# Altium PCB SHAJUN_MAIN_PCB.PcbDoc
Units mil, origin at the board's own origin, x right, y up, seen from the top; angles counter-clockwise.
Board outline 2074.72 x 1982.28 mil, 2 copper layers (Top Layer, Bottom Layer); 77 components, 66 nets, 204 pads, 301 vias.
Unrouted connection lines stored in the file: 256.
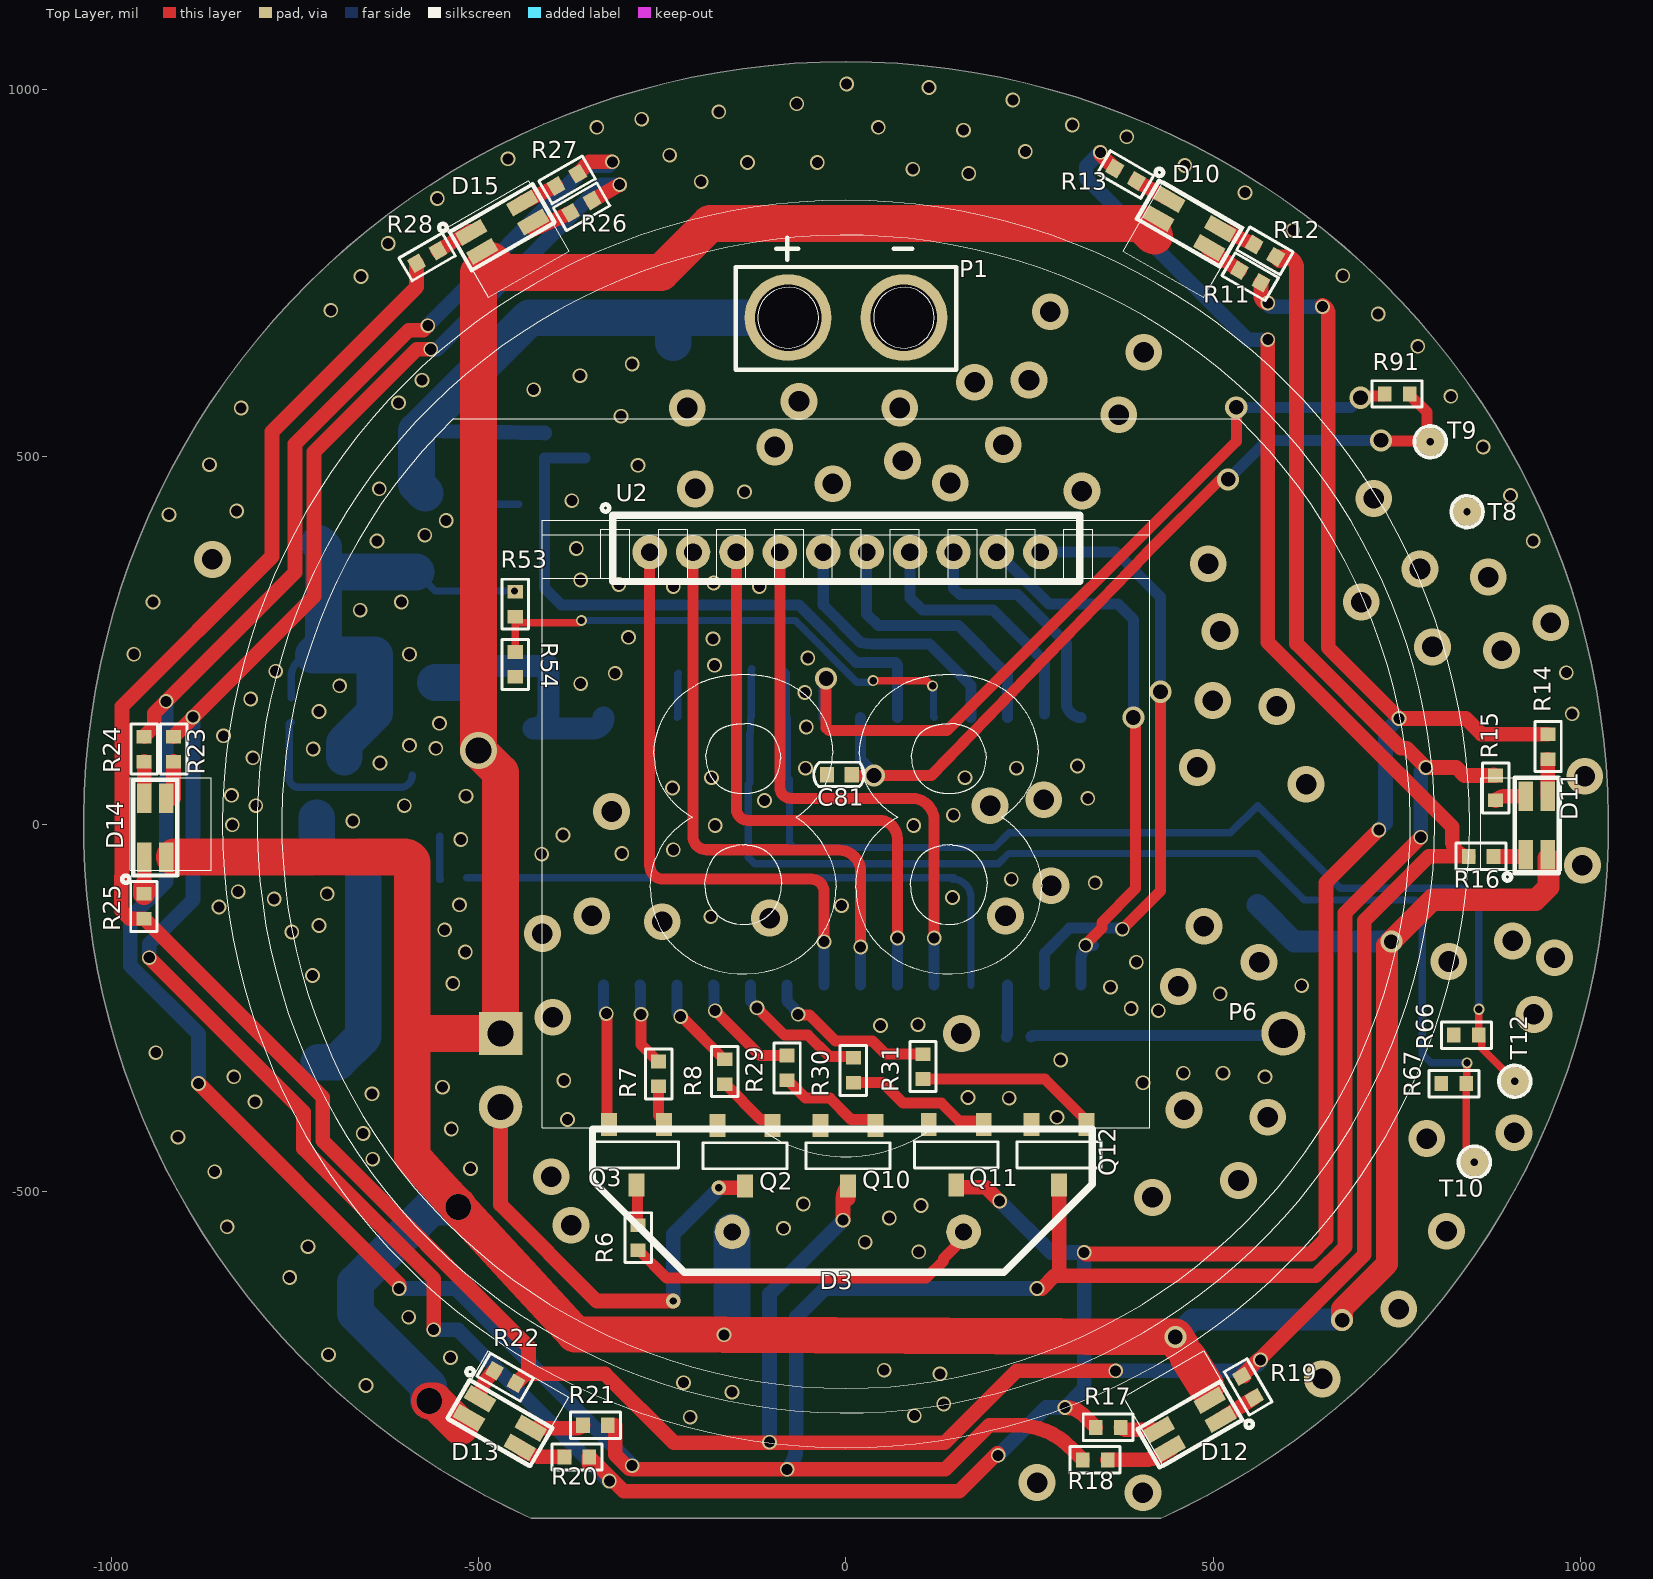
[diagram p0: Top Layer view]
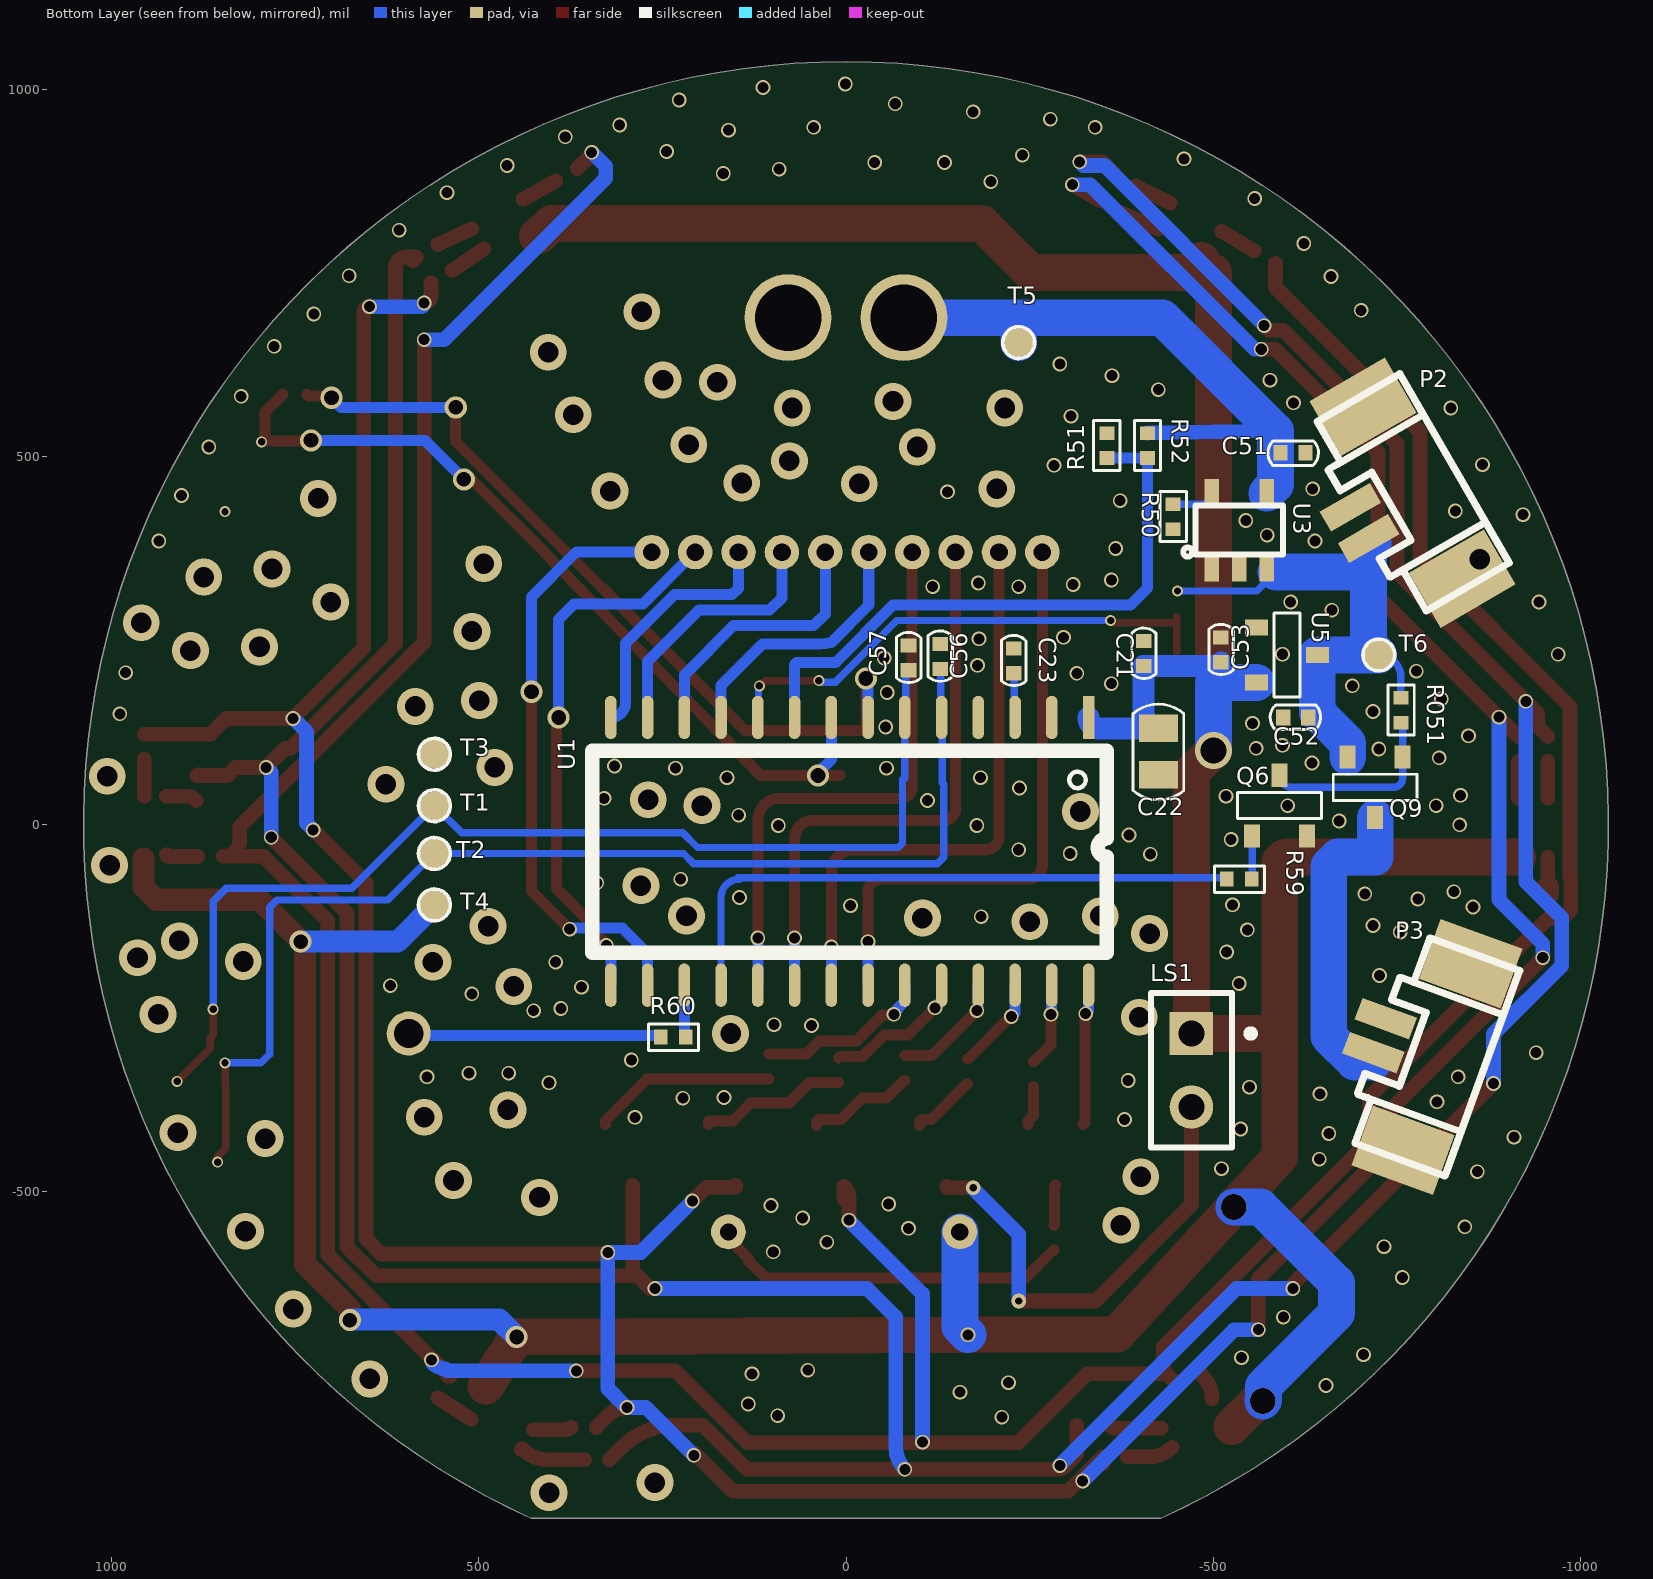
[diagram p1: Bottom Layer view, seen from below]

## Layer stack, top to bottom
Top Solder: solder mask 0.4, Solder Resist, Dk 3.5
Top Layer: signal copper 1.4
Dielectric 1: dielectric 12.6, FR-4, Dk 4.8
Bottom Layer: signal copper 1.4
Bottom Solder: solder mask 0.4, Solder Resist, Dk 3.5

## Board outline
-428.25,-944.88 cw(c0,0) 428.25,-944.88

## Design rules (kind name [scope] priority, off if disabled: settings)
Clearance [All] p1: gap=6 ignorepadtopadclearanceinfootprint=FALSE
ComponentClearance [All] p1: gap=0 collisioncheckmode=3 verticalgap=0 showdistances=FALSE
HoleSize [All] p1: absolutevalues=TRUE maxlimit=100 minlimit=6 maxpercent=80.000 minpercent=20.000
PolygonConnect [All] p1: connectstyle=Relief reliefconductorwidth=10 reliefentries=4 polygonreliefangle="90 Angle" airgapwidth=10
RoutingLayers RoutingLayers_1 [All] p1: top layer_v5=TRUE bottom layer_v5=TRUE
RoutingVias [All] p1: holewidth=15 width=20 viastyle="Through Hole" minholewidth=10 minwidth=15 maxholewidth=50 maxwidth=80
SolderMaskExpansion [All] p1: expansion=4
Width [All] p1: maxlimit=50 minlimit=6 preferedwidth=15
27 further rules are at their usual default settings.

## Classes and differential pairs
component class power_board: C51 C52 C53 D10 D11 D12 D14 D15 P1 P2 P3 Q6 Q9 Q10 Q11 Q12 R11 R12 R13 R14 R15 R16 R17 R18 R19 R20 R21 R22 R23 R24 R25 R26 R27 R28 R29 R30 R31 R50 R051 R51 R52 R53 R54 R59 T5 T6 U3 U5
component class main_board: C21 C22 C23 C56 C57 D3 LS1 P6 Q2 Q3 R6 R7 R8 R60 R66 R67 R91 T1 T2 T3 T4 T8 T9 T10 T12 U1 U2

## Components (designator, comment, footprint, x,y, rotation, side; value= is the part's Value field where it differs from the comment)
C21 "Cap" C0402 -405,231.93 r270 bottom value=104
C22 "Cap" C0805 -425,98.5 r90 bottom value=10uF
C23 "Cap" C0402 -228,222 r270 bottom value=223±5%
C51 "Cap" C0402 -608.07,505 r0 bottom value=1uF
C52 "Cap" C0402 -611.93,145 r180 bottom value=1uF
C53 "Cap" C0402 -510,236.93 r270 bottom value=1uF
C56 "Cap" C0402 -128,228 r270 bottom value=10nF
C57 "Cap" C0402 -85,226.07 r270 bottom value=10nF
C81 "Cap" C0402 -9.07,67 r0 top value=10nF
D3 "BACK_LIGHT" BACK_LIGHT -155,-555 r0 top
D10 "KO-2012RGB" KO-2012RGB 402.68,825.36 r330 top
D11 "KO-2012RGB" KO-2012RGB 965,-62 r90 top
D12 "KO-2012RGB" KO-2012RGB 507.32,-765.36 r210 top
D13 "KO-2012RGB" KO-2012RGB -535.32,-806.64 r330 top
D14 "KO-2012RGB" KO-2012RGB -915,-65 r90 top
D15 "KO-2012RGB" KO-2012RGB -507.32,760.36 r30 top
LS1 "Speaker" PIN2 -470,-285 r270 bottom
P1 "USB/5V" USB5.0V -125,647.95 r0 top
P2 "BAT/4.2" CON_1.25MM_2P -735,430 r60 bottom
P3 "UV/4.2V" CON_1.25MM_2P -764.75,-302.63 r110 bottom
P6 "TOUCHPAD" TP2MMAAA 595,-285 r0 top
Q2 "S8050" SOT23 -137.4,-451.34 r270 top
Q3 "S8050" SOT23 -285,-450 r270 top
Q6 "S8050" SOT23 -590,25 r90 bottom
Q9 "A03415" SOT23 -720,50 r270 bottom
Q10 "S8050" SOT23 2.6,-451.34 r270 top
Q11 "S8050" SOT23 150,-450 r270 top
Q12 "S8050" SOT23 290,-450 r270 top
R6 "1.2k" R0402 -283,-563 r90 top value=10R
R7 "1.2k" R0402 -255,-340 r90 top value=1k
R8 "1.2k" R0402 -165,-336.93 r90 top value=1k
R11 "1.2k" R0402 550,745 r330 top value=12R
R12 "1.2k" R0402 570,780 r330 top value=12R
R13 "1.2k" R0402 380.34,883.46 r150 top value=80R
R14 "1.2k" R0402 955,105.07 r90 top value=12R
R15 "1.2k" R0402 884,49.07 r90 top value=12R
R16 "1.2k" R0402 864,-44 r180 top value=80R
R17 "1.2k" R0402 356.93,-821 r180 top value=12R
R18 "1.2k" R0402 339,-865 r180 top value=12R
R19 "1.2k" R0402 547,-766 r120 top value=80R
R20 "1.2k" R0402 -366.07,-861 r0 top value=12R
R21 "1.2k" R0402 -340.93,-818 r0 top value=12R
R22 "1.2k" R0402 -463.66,-752.54 r330 top value=80R
R23 "1.2k" R0402 -915,101.93 r90 top value=12R
R24 "1.2k" R0402 -955,101.93 r90 top value=12R
R25 "1.2k" R0402 -955,-111.93 r270 top value=80R
R26 "1.2k" R0402 -360,840 r30 top value=12R
R27 "1.2k" R0402 -379.66,876.54 r30 top value=12R
R28 "1.2k" R0402 -569.66,771.54 r210 top value=80R
R29 "1.2k" R0402 -80,-331.93 r270 top value=1k
R30 "1.2k" R0402 10,-335 r270 top value=1k
R31 "1.2k" R0402 105,-330 r270 top value=1k
R50 "Res2" R0402 -445,418.07 r90 bottom value=1.65K
R51 "Res1" R0402 -355,515 r270 bottom value=5.1K
R051 "Res1" R0402 -755,155 r90 bottom value=100K
R52 "Res1" R0402 -410,515 r90 bottom value=5.1K
R53 "Res1" R0402 -450,298.93 r90 top value=1M
R54 "Res1" R0402 -450,217.07 r90 top value=1M
R59 "1.2k" R0402 -535,-75 r180 bottom value=1k
R60 "Res1" R0402 235,-290 r180 bottom value=3.3K
R66 "1.2k" R0402 843.93,-287 r0 top value=1.2K
R67 "1.2k" R0402 827,-353 r0 top value=1.2K
R91 "Res1" R0402 750,585 r180 top value="5.1k 1%"
T1 "R" TP1_3MMD 560,25 r90 bottom
T2 "T" TP1_3MMD 560,-40 r90 bottom
T3 "G" TP1_3MMD 560,95 r90 bottom
T4 "V" TP1_3MMD 560,-110 r90 bottom
T5 "USB/5V" TP1_3MMD -235,655 r180 bottom
T6 "BAT/4.2V" TP1_3MMD -725,230 r180 bottom
T8 "NTC" TP1_3MMD 845,425 r0 top
T9 "NTC" TP1_3MMD 795,520 r0 top
T10 "TDS+" TP1_3MMD 855,-460 r90 top
T12 "TDS-" TP1_3MMD 910,-350 r90 top
U1 "CA51F353S6" CA51F35S6-SOP28 -330,145 r270 bottom locked
U2 "LCD" LCD_DISPLAY -267.17,370 r0 top
U3 "PL4054" SOT23-5 -535,400 r180 bottom
U5 "XC6206P302MR" SOT23 -600,230 r180 bottom

## Footprints (in the part's own frame and the unit in brackets; to place one, negate y for a bottom-side part, rotate by r counter-clockwise, add the part's x,y. Pads: shape width x height; smd on the part's side, far side on the other; paste and mask are expansions set on the pad)
BACK_LIGHT [mm]
  round 1.2 hole 0.6: 1(0,0) 2(8,0)
  silkscreen extent -4.83,-1.4 12.45,3.56
C0402 [mm]
  rect 0.49x0.54 smd: 1(-0.43,0) 2(0.43,0)
  Top Layer pour cut-out: -0.071,-0.244 -0.071,0.244 0.071,0.244 0.071,-0.244 -0.071,-0.244
  silkscreen extent -0.88,-0.41 0.86,0.43
C0805 [mm]
  rect 0.95x1.35 smd: 1(-0.8,0) 2(0.8,0)
  silkscreen extent -1.67,-0.88 1.64,0.88
CA51F35S6-SOP28 [mm]
  rect 1.5x0.4 smd: 1(0,0)
  oval 1.5x0.4 smd: 2(0,-1.27) 3(0,-2.54) 4(0,-3.81) 5(0,-5.08) 6(0,-6.35) 7(0,-7.62) 8(0,-8.89) 9(0,-10.16) 10(0,-11.43) 11(0,-12.7) 12(0,-13.97) 13(0,-15.24) 14(0,-16.51) 15(9.254,-16.51) 16(9.254,-15.24) 17(9.254,-13.97) 18(9.254,-12.7) 19(9.254,-11.43) 20(9.254,-10.16) 21(9.254,-8.89) 22(9.254,-7.62) 23(9.254,-6.35) 24(9.254,-5.08) 25(9.254,-3.81) 26(9.254,-2.54) 27(9.254,-1.27) 28(9.254,0)
  silkscreen extent 1.14,-17.15 8.13,0.63
CON_1.25MM_2P [mm]
  rect 0.8x2 smd: 1(-0.609,1.056) 2(0.641,1.056)
  rect 2.2x3 smd: 3(3.429,-1.056) 4(-3.429,-1.056)
  silkscreen extent -3.77,-2.73 3.78,1.08
KO-2012RGB [mil]
  rect 40x20 smd: 1(20,40) 2(100,40) 3(20,10) 4(100,10)
  silkscreen extent -15,-5 125,70
LCD_DISPLAY [mil]
  round 47 hole 24: 1(0,0) 2(59.06,0) 3(118.11,0) 4(177.17,0) 5(236.22,0) 6(295.28,0) 7(354.33,0) 8(413.39,0) 9(472.44,0) 10(531.5,0)
  silkscreen extent -65,-40 585,65
PIN2 [mm] "Photosensitive Diode; 2 Leads"
  rect 1.5x1.5 hole 0.9: 1(0,0)
  round 1.5 hole 0.9: 2(2.54,0)
  silkscreen extent -1.4,-1.4 3.94,2.17
R0402 [mm]
  rect 0.47x0.52 smd: 1(-0.43,0) 2(0.43,0)
  silkscreen extent -0.86,-0.46 0.87,0.45
SOT23 [mm]
  rect 0.8x0.55 smd: 1(-1.05,0.95) 2(-1.05,-0.95) 3(1.05,0)
  silkscreen extent -0.45,-1.45 0.45,1.45
SOT23-5 [mm]
  rect 0.5x1 smd: 1(-0.952,-1.27) 2(0,-1.27) 3(0.953,-1.27) 4(0.953,1.27) 5(-0.952,1.27)
  silkscreen extent -1.94,-0.92 1.51,0.85
TP1_3MMD [mm]
  round 1 smd: 1(0,0)
  silkscreen extent -0.55,-0.55 0.55,0.55
TP2MMAAA [mil]
  round 60 hole 40 mask+5: 1(0,0)
USB5.0V [mm]
  round 3 hole 2.3: 1(1.175,1.042) 2(5.175,1.042)
  silkscreen extent -0.64,-0.76 6.98,3.81

## Part data
C21 C22 C23 C51 C52 C53 C56 C57 C81: "电容", LatestRevisionDate=17-Jul-2002, LatestRevisionNote="Re-released for DXP Platform.", PackageDescription="Radial Cap, Thru-Hole; 2 Leads; 0.3 in Pin Spacing", PackageReference=RAD-0.3, Published=8-Jun-2000, Publisher="Altium Limited"
D3: "LCD背光"
D10 D11 D12 D13 D14 D15: "三色LED"
LS1: "蜂鸣器", LatestRevisionDate=17-Jul-2002, LatestRevisionNote="Re-released for DXP Platform.", PackageReference=PIN2, Published=24-Mar-1999, Publisher="Altium Limited"
P1: library part "Header 2", "充电焊接口", LatestRevisionDate=17-Jul-2002, LatestRevisionNote="Re-released for DXP Platform.", Publisher="Altium Limited"
P2: library part "Header 2", "电池连接母座", LatestRevisionDate=17-Jul-2002, LatestRevisionNote="Re-released for DXP Platform.", Publisher="Altium Limited"
P3: library part "Header 2", "UV灯接口", LatestRevisionDate=17-Jul-2002, LatestRevisionNote="Re-released for DXP Platform.", Publisher="Altium Limited"
P6: "触摸弹簧"
Q2 Q3 Q6 Q10 Q11 Q12: "三极管"
Q9: "PMOS管"
R6 R7 R8 R11 R12 R13 R14 R15 R16 R17 R18 R19 R20 R21 R22 R23 R24 R25 R26 R27 R28 R29 R30 R31 R59 R66 R67: library part Res3, "电阻", LatestRevisionDate=29-May-2009, LatestRevisionNote="IPC-7351 Footprint Added.", PackageDescription="Chip Resistor", PackageReference=J1-0603, Published=8-Jun-2000, Publisher="Altium Limited"
R50 R51 R051 R52 R53 R54 R60 R91: "电阻", LatestRevisionDate=17-Jul-2002, LatestRevisionNote="Re-released for DXP Platform.", Published=8-Jun-2000, Publisher="Altium Limited"
  R50: PackageDescription="Axial Device, Thru-Hole; 2 Leads; 0.4 in Pin Spacing", PackageReference=AXIAL-0.4
  R51 R051 R52 R53 R54 R60 R91: PackageDescription="Axial Device, Thru-Hole; 2 Leads; 0.3 in Pin Spacing", PackageReference=AXIAL-0.3
T1: library part TEST, "烧录点Rx"
T2: library part TEST, "烧录点Tx"
T3: library part TEST, "烧录点GND"
T4: library part TEST, "烧录点VCC"
T5: library part TEST, "USB充电检测点"
T6: library part TEST, "电池检测点"
T8 T9: library part TEST, "NTC焊点"
T10 T12: library part TEST, "TDS焊点"
U1: "主控IC"
U2: "LCD显示屏"
U3: "充电IC"
U5: "稳压IC"

## Via types
v1: diameter 20, hole 15, Top Layer to Bottom Layer, 213 vias
v2: diameter 50, hole 28, Top Layer to Bottom Layer, 62 vias
v3: diameter 30, hole 20, Top Layer to Bottom Layer, 11 vias
v4: diameter 15, hole 10, Top Layer to Bottom Layer, 10 vias
v5: diameter 20, hole 10, Top Layer to Bottom Layer, 2 vias
v6: diameter 35, hole 35, Top Layer to Bottom Layer, 2 vias
v7: diameter 50, hole 35, Top Layer to Bottom Layer, 1 vias

## Nets (pads, with @x,y where several pads share a name; then routed paths per layer and width w, separated by ;. In a path a pad name is that pad's centre, name@x,y a point inside that pad or via, vN(x,y) a via of type N, cw(c..) or ccw(c..) an arc to the next point about the centre after c; other vN are vias at no path point)
BACK_LIGHT: R7.2 U1.27 | length 114.7
  Top Layer w15: v1(-279,-259) -279,-300.06 -255.98,-323.07 R7.2
  Bottom Layer w15: U1.27 -279.86,-219.47 -279.86,-258.14 v1(-279,-259)
BAT/4.2V: C52.2 P2.1 Q9.2 R051.2 R53.2 T6.1 U3.3 U5.3 | length 747.5
  Top Layer w10: v4(-451,317) -451,316.86 R53.2
  Bottom Layer w10: R051.2 -755,200 cw(c-725,200) T6.1 ; -585,343 -559,317 v4(-451,317)
  Bottom Layer w50: P2.1@-717.24,382.17 -710.97,375.9 -710.97,343 ; Q9.2 -682.6,110.08 -641.34,151.34 U5.3 T6.1 -710.97,244.03 -710.97,343 ; -585,343 -710.97,343
BAT_ADC: R53.1 R54.2 U1.10 | length 699.6
  Top Layer w10: R54.2 R53.1@-450,274 ; R53.1 R53.1@-450,274 ; v4(-360,277) -363,274 R53.1@-450,274 ; v4(37,195) 110,195 117,188 v4(118,188)
  Bottom Layer w10: v4(-360,277) -69.23,277 14.77,193 35,193 v4(37,195) ; v4(118,188) 118.96,187.04 118.96,146.04 U1.10
BLUE: Q11.3 R11.2 R14.2 R17.2 R20.2 R23.2 R26.2 | length 5648.5
  Top Layer w20: v1(-948,-181.88) -738,-391.88 -738,-441.77 -561,-618.77 v1(-561,-688) ; R23.2 v1(-888.43,145.43) -723.76,310.1 -723.76,506.24 -584,646 v1(-565,646) ; R20.2@-349.89,-870.01 -349.89,-861.24 -349.65,-861 R20.2 -302.14,-908 154,-908 206,-856 cw(c203.59,-858.41) 207,-858.41 v1(207,-859) ; R26.2 v1(-308,870) ; Q11.3 150,-494 190,-494 v1(209,-513) ; v1(298,-794) cw(c298,-830.21) 323.61,-804.61 R17.2 ; v1(324,-583) 326,-585 632.23,-585 653,-564.23 653,-80 v1(725,-8) ; R11.2 564.66,718.34 ccw(c574,718.34) v1(574,709) ; v1(648.35,704) 648.35,705.48 cw(c645,695) 656,695 656,240.02 v1(752.36,143.66) 843.1,143.66 864.77,122 R14.2
  Bottom Layer w20: v1(-948,-181.88) -948,-162.77 -888.43,-103.19 v1(-888.43,145.43) ; v1(-565,646) -556,646 -332,870 v1(-308,870) ; v1(-561,-688) -528,-688 v1(-322,-894) ; v1(207,-859) 272,-794 v1(298,-794) 324,-768 v1(324,-583) 279,-583 v1(209,-513) ; v1(574,709) ccw(c579,709) 579,704 v1(648.35,704) ; v1(725,-8) 734,1 734,125.31 v1(752.36,143.66)
CHARG_CHECK: R51.2 R52.1 U1.9 | length 826.8
  Bottom Layer w15: R51.2 R52.1 -410,321 -387,298 -64.07,298 13.93,220 65,220 cw(c65,215) 70,215 U1.9
COM1: U1.22 U2.1 | length 811.1
  Top Layer w15: U2.1 -267.17,-56.25 ccw(c-248.42,-56.25) -248.42,-75 -47.07,-75 cw(c-47.07,-92.07) -30,-92.07 v1(-30,-160)
  Bottom Layer w15: U1.22 v1(-30,-160)
COM2: U1.21 U2.2 | length 800.2
  Top Layer w15: U2.2@-205.87,367.76 U2.2 -208.11,-16.89 ccw(c-190,-16.89) -190,-35 -80,-35 cw(c-80,-135) -69.44,-35.56 -9.44,-35.56 cw(c-9.44,-65) 20,-65 20,-124.44 19.44,-124.44 cw(c-80,-135) 20,-135 v1(20,-167.3)
  Bottom Layer w15: U1.21 v1(20,-167.3)
COM3: U1.20 U2.3 | length 791
  Top Layer w15: U2.3 -149.06,20.42 ccw(c-133.63,20.42) -133.63,5 45,5 cw(c45,-20) 70,-20 v1(70,-155)
  Bottom Layer w15: U1.20 v1(70,-155)
COM4: U1.19 U2.4 | length 780
  Top Layer w15: U2.4 -90,50 ccw(c-75,50) -75,35 90,35 cw(c90,5) 120,5 v1(120,-155)
  Bottom Layer w15: U1.19 v1(120,-155)
GND: C21.1 C22.1 C23.1 C51.1 C52.1 C53.1 C56.1 C57.1 C81.1 P1.2 P2.2 P3.2 Q2.2 Q3.2 Q6.2 Q10.2 Q11.2 Q12.2 R50.1 R51.1 R54.1 R66.1 R67.1 T3.1 T8.1 U1.28 U3.2 U5.1 | length 192.5
  Top Layer w15: v1(-326,-258) -325.04,-258.96 -325.04,-406.02 Q3.2
  Bottom Layer w15: U1.28 -329.86,-219.47 -329.86,-254.14 v1(-326,-258)
  other v1: -212,-807 93,-805 133,-789 -155,-773 -653,-764 -221,-760 128,-748 52,-743 -538,-726 -704,-722 -595,-671 -757,-617 99,-582 -732,-575 26,-569 -85,-550 -842,-548 59,-536 102,-519 -58,-517 -859,-473 -511,-469 -644,-456 -909,-426 -657,-421 -537,-415 -379,-402 287,-399 -804,-378 222,-373 166,-372 -645,-367 -549,-358 404,-352 -384,-349 -833,-344 570,-344 459,-339 513,-339 292,-321 -939,-311 47,-274 98,-273 425,-254 388,-251 509,-231 360,-222 620,-220 -535,-217 -726,-206 395,-188 -518,-174 -754,-147 -546,-144 -717,-138 -184,-126 -853,-113 -6,-111 -526,-110 -778,-102 145,-100 -706,-95 -827,-92 339,-80 225,-75 -414,-41 -305,-40 -235,-35 -524,-21 -385,-15 -178,-2 92,-2 -835,-1 -671,4 146,12 -803,25 -601,25 -111,32 329,35 -517,38 -836,39 -236,49 -183,63 162,63 -55,76 232,76 315,79 -634,83 -807,90 -725,102 -558,103 -594,107 -847,120 -54,132 -553,137 988,150 -717,153 -810,170 -56,179 -689,188 -361,191 -314,205 980,206 -776,208 -179,216 -52,226 -969,231 -594,231 -181,252 -296,254 -661,291 -943,302 -605,302 -235,323 -118,323 -309,326 -180,328 -361,332 -367,375 -638,385 935,385 -573,393 -544,413 -921,421 -829,426 -373,440 904,447 -138,452 -635,456 -283,488 -866,489 867,513 -306,555 -823,566 -609,573 823,582 -425,591 -577,604 -362,610 -291,626 778,650 724,694 -701,699 -660,745 676,746 -623,790 608,808 -556,851 543,859 -197,874 167,885 91,891 461,896 -134,900 -39,900 -460,905 -240,910 244,915 382,935 160,944 -339,948 44,948 308,951 -278,959 -173,969 -67,980 227,985 113,1002 1,1007
  other v2: 404,-910 260,-896 648,-755 752,-660 817,-554 -374,-546 417,-508 534,-485 -401,-480 790,-428 909,-420 574,-399 460,-389 157,-285 -399,-263 936,-259 452,-221 562,-188 820,-187 964,-182 907,-159 -413,-149 487,-139 -250,-133 -104,-128 -346,-125 217,-125 279,-84 1002,-56 -319,17 196,25 269,33 626,54 1005,65 478,77 586,160 499,168 892,236 798,241 509,262 959,274 701,302 874,336 781,347 493,354 718,443 321,453 -205,456 -18,463 142,464 77,494 -97,513 214,516 371,557 -216,566 73,566 -64,575 175,601 249,604 405,642 278,697
  other v4: 845,425
GREEN: Q12.3 R12.2 R15.2 R18.2 R21.2 R24.2 R27.2 | length 5957.8
  Top Layer w20: R24.2 -955,119.37 -941.24,133.13 -941.24,150.7 v1(-924.97,166.97) -749.76,342.18 -749.76,517.01 -594.77,672 -575,672 v1(-569,678) ; v1(-881,-353) -608,-626 v1(-608,-632) ; R27.2 -349,901 v1(-318,901) ; -314,-818 -314,-858 v1@-295,-877 ; v1@-291,-878 v1(-80,-878) 135,-878 195,-818 233.65,-818 cw(c233.65,-918) 304.36,-847.29 R18.2 ; v1(260,-632) 266.29,-632 283.58,-614.71 287,-614.71 ; Q12.3 290,-611.71 287,-614.71 ; R12.2@589.44,766.76 R12.2 598.46,771.54 cw(c598.46,757) 613,757 613,245.23 755.12,103.12 762.88,103.12 v1(789,77) 830.49,77 841.49,66 883.41,66 cw(c883.41,69.41) R15.2@881,67 ; v1(782,-18) 679,-121 679,-575 639.29,-614.71 287,-614.71
  Bottom Layer w20: v1(-924.97,166.97) -924.97,-78.5 -974,-127.53 -974,-192.65 -881,-285.65 v1(-881,-353) ; v1(-608,-632) -531.23,-632 -291,-872.23 v1(-291,-873) ; v1(-569,678) -569,678.77 -351.77,896 -323,896 v1(-318,901) ; v1(-80,-878) ccw(c-109.54,-848.46) -67.77,-848.46 -67.77,-670.77 -29,-632 v1(260,-632) ; v1(782,-18) 782,70 v1(789,77)
LED_B: R30.1 U1.24 | length 193.6
  Top Layer w15: v1(-121,-250) -84,-287 -52.06,-287 -22.74,-316.32 8.25,-316.32 R30.1
  Bottom Layer w15: U1.24 -130,-240.99 v1(-121,-250)
LED_G: R31.1 U1.23 | length 238.3
  Top Layer w15: v1(-65,-259) -64.04,-259.96 -49.36,-259.96 -14,-295.32 36.13,-295.32 53.88,-313.07 R31.1
  Bottom Layer w15: U1.23 -80,-240.78 -69.78,-251 -69.78,-252.87 -65,-257.65 v1(-65,-259)
LED_R: R29.1 U1.25 | length 158.8
  Top Layer w15: v1(-178,-254) -117,-315 R29.1
  Bottom Layer w15: U1.25 -179.86,-219.47 -179.86,-250.79 -178,-252.65 v1(-178,-254)
NetC23_2: C23.2 U1.3 | length 60.9
  Bottom Layer w10: U1.3 -229,146 -229,204.07 C23.2
NetC82_1: 
NetD3_2: D3.2 R6.1 | length 491.8
  Top Layer w15: R6.1 -282.02,-579.93 -244,-617.94 109.06,-617.94 132.58,-594.42 132.58,-591.11 159.96,-563.73 D3.2
NetD10_1: D10.1 R13.1 | length 51.5
  Top Layer w20: R13.1 D10.1
NetD10_2: D10.2 R12.1 | length 50.8
  Top Layer w20: D10.2 R12.1
NetD10_4: D10.4 R11.1 | length 51.5
  Top Layer w20: D10.4@492.97,782.71 493.24,782.52 R11.1
NetD11_1: D11.1 R16.1 | length 43.6
  Top Layer w20: R16.1@882,-44.14 919.83,-44.14 ccw(c919.83,-36.83) D11.1
NetD11_2: D11.2 R15.1 | length 42.6
  Top Layer w20: R15.1 cw(c898.14,18) 898.14,38 D11.2
NetD11_4: D11.4 R14.1 | length 50.1
  Top Layer w20: D11.4 R14.1
NetD12_1: D12.1 R19.1 | length 54.1
  Top Layer w20: D12.1 R19.1
NetD12_2: D12.2 R18.1 | length 90.8
  Top Layer w20: R18.1 404.51,-865 ccw(c404.51,-813.79) D12.2 441.87,-851.44 D12.2@442.03,-851.31
NetD12_4: D12.4 R17.1 | length 52.7
  Top Layer w20: R17.1 ccw(c381.15,-813.71) 381.15,-824.02 D12.4
NetD13_1: D13.1 R22.1 | length 44.2
  Top Layer w20: D13.1 cw(c-453.94,-782) R22.1@-485.1,-750.85 ; R22.1@-485.09,-750.84 R22.1
NetD13_2: D13.2 R21.1 | length 71.9
  Top Layer w20: D13.2 -367.52,-822 ccw(c-367.52,-808.34) R21.1
NetD13_4: D13.4 R20.1 | length 64.2
  Top Layer w20: D13.4 ccw(c-412.29,-816.55) -412.29,-861 R20.1
NetD14_1: D14.1 R25.1 | length 59
  Top Layer w20: R25.1 D14.1
  Top Layer w30: R25.1@-955.18,-86 R25.1
NetD14_2: D14.2 R24.1 | length 50
  Top Layer w20: D14.2 R24.1
NetD14_4: D14.4 R23.1 | length 60
  Top Layer w20: D14.4 -915,35 R23.1
NetD15_1: D15.1 R28.1 | length 51
  Top Layer w20: R28.1 D15.1@-511.31,806.31
NetD15_2: D15.2 R27.1 | length 51.8
  Top Layer w20: D15.2 R27.1
NetD15_4: D15.4 R26.1 | length 55
  Top Layer w20: D15.4@-425,809.31 -422.01,810.63 R26.1
NetD80_1: 
NetLS1_2: LS1.2 Q2.3 | length 639.4
  Top Layer w20: LS1.2 -470,-518 -339,-649 v5(-235,-649) ; v5(-173,-495) -138.23,-495 -137.4,-494.17 Q2.3
  Bottom Layer w20: v5(-235,-649) -235,-558 -173,-496 v5(-173,-495)
NetP6_1: P6.1 R60.1 | length 345.6
  Bottom Layer w15: R60.1 251.93,-289.25 253.68,-287.5 592.5,-287.5 P6.1
NetQ2_1: Q2.1 R8.1 | length 91.1
  Top Layer w15: R8.1 -164.02,-353.86 -116.12,-401.75 -103.33,-401.75 -100,-405.08 Q2.1
NetQ3_1: Q3.1 R7.1 | length 54.8
  Top Layer w15: R7.1 -255,-396.34 -247.6,-403.74 Q3.1
NetQ3_3: Q3.3 R6.2 | length 55.6
  Top Layer w15: Q3.3 -284,-492.34 -284,-545.07 R6.2
NetQ6_1: Q6.1 R59.2 | length 59.3
  Bottom Layer w10: Q6.1 -552.6,-75 R59.2
NetQ6_3: Q6.3 Q9.1 R051.1 | length 260.8
  Bottom Layer w10: R051.1 ccw(c-755,135.67) -757.4,135.67 Q9.1 -757.4,62.4 ccw(c-745,62.4) -745,50 -606.34,50 ccw(c-606.34,66.34) Q6.3
NetQ10_1: Q10.1 R29.2 | length 148.2
  Top Layer w15: R29.2 -79.02,-348.86 -54.87,-373 -22.08,-373 6.67,-401.75 36.67,-401.75 40,-405.08 Q10.1
NetQ11_1: Q11.1 R30.2 | length 205.2
  Top Layer w15: R30.2 49.93,-351.93 77.41,-379.41 129.63,-379.41 154.07,-403.86 184.07,-403.86 Q11.1@187.4,-407.19 ; Q11.1 Q11.1@187.4,-407.19 ; Q11.1@187.4,-403.74 Q11.1@187.4,-407.19
NetQ12_1: Q12.1 R31.2 | length 251
  Top Layer w15: R31.2 105.17,-346.75 270.42,-346.75 327.4,-403.74 Q12.1
NetQ80_1: 
NetR50_2: R50.2 U3.5 | length 61.1
  Bottom Layer w10: U3.5 ccw(c-482.5,450) -482.5,435 R50.2
NetR60_2: R60.2 U1.17 | length 71.5
  Bottom Layer w15: R60.2 218.07,-289.02 220,-287.09 U1.17
NetR83_2: 
NTC_CHECK: C81.2 R91.1 T9.1 U1.8 | length 1141.9
  Top Layer w15: C81.2 8.86,66 v3(38,66) 116.01,66 226.55,179.93 409.07,368.05 409.06,368.67 509.23,468.84 v3(520,469) ; v3(728,522) 729,521 T9.1@794,521 ; R91.1 766.93,584.02 790.34,560.61 790.34,524.66 T9.1@794,521 ; v4(795,520) T9.1@794,521
  Bottom Layer w15: U1.8 20,88.06 38,70.06 v3(38,66) ; v3(520,469) 573,522 v3(728,522)
NTC_VCC: R91.2 U1.7 | length 1100.5
  Top Layer w15: v3(-27,198) -27,131 -23,127 137.69,127 531,520.3 v3(531,567) ; v3(700,580) 702.5,582.5 731.32,582.5 733.07,584.25 R91.2
  Bottom Layer w15: U1.7 -29.86,145.14 -29.86,195.14 v3(-27,198) ; v3(531,567) 687,567 v3(700,580)
RED: Q10.3 R13.2 R16.2 R19.2 R22.2 R25.2 R28.2 | length 5530.7
  Top Layer w20: R28.2 -584.32,730.68 -781,534 -781,364 -985,160 -985,-70.82 -986.18,-72 -986.18,-117.18 -974.46,-128.9 R25.2 R25.2 -712,-371.86 -712,-431 -432,-711 -432,-744 -436,-748 ; R22.2 -436,-748 ; v1(-4,-539) -4,-508.61 cw(c18.53,-508.61) Q10.3 2.6,-509.83 ; v1(346,914) 346,911.61 R13.2 ; v1(367,-744) 232.23,-744 134.23,-842 -234,-842 -328,-748 -436,-748 ; R19.2@541.66,-751.34 R19.2 560.87,-729 v1(564,-729) 564,-726.77 705,-585.77 705,-131.77 792.77,-44 R16.2@847,-44 ; v1(574,659) 574,247.46 825,-3.54 825,-21.93 ccw(c847.07,-21.93) R16.2@847,-44 ; R16.2 R16.2@847,-44
  Bottom Layer w20: v1(-104,-841) -104,-639 v1(-4,-539) ; v1(346,914) 327,895 327,878.63 546.63,659 v1(574,659) ; v1(367,-744) 542.1,-744 545.1,-741 ccw(c545.1,-717.1) v1@562,-734
RX/TDS-: C57.2 R66.2 T1.1 T12.1 U1.6 | length 1519.6
  Top Layer w10: v4(861,-252) 860.93,-252.07 R66.2 R66.2 865.11,-291.25 865.11,-305.11 v4(910,-350)
  Bottom Layer w10: C57.2 -81.1,205.24 -81.1,146.1 U1.6 -80,61.93 ; -76.86,61 -76.86,-26.14 -71,-32 202,-32 222,-12 523,-12 T1.1 672.31,-87.31 843.31,-87.31 861,-105 v4(861,-252)
SEG1: U1.11 U2.5 | length 361.3
  Bottom Layer w15: U2.5 -30.94,297.73 19.93,246.86 ccw(c35.53,311.48) 35.53,245 113.4,245 170,188.4 U1.11
SEG2: U1.12 U2.6 | length 368.3
  Bottom Layer w15: U2.6 28.11,285.89 44,270 153,270 220,203 U1.12
SEG3: U1.13 U2.7 | length 352
  Bottom Layer w15: U2.7 87.17,307.83 104,291 200,291 270,221 U1.13@270,150
SEG4: U1.14 U2.8 | length 346.2
  Bottom Layer w15: U2.8 146.22,320.71 154.93,312 233.58,312 300,245.58 300,165 ccw(c320,165) U1.14
SEG5: U1.15 U2.9 | length 749.1
  Top Layer w15: v1(326,-165) 326,-163.65 348.17,-141.48 348.17,-133.83 394,-88 v3@394,135
  Bottom Layer w15: U2.9 276.14,299.14 369.86,299.14 391,278 v3(391,145) ; U1.15 320,-182.07 cw(c337.07,-182.07) 337.07,-165
SEG6: U1.16 U2.10 | length 835.2
  Top Layer w15: v1(376,-143) 428,-91 v3(428,180) 421,180 v3@420,181
  Bottom Layer w15: v1(264.33,370) 367,370 428,309 v3(428,180) ; U1.16 270,-175.94 304.44,-141.5 374.5,-141.5 v1(376,-143)
SPEAKER: R8.2 U1.26 | length 128.8
  Top Layer w15: v1(-225,-262) -223.98,-262 -165.98,-320 R8.2
  Bottom Layer w15: U1.26 -229.86,-219.47 -229.86,-257.14 v1(-225,-262)
TX/TDS+: C56.2 R67.2 T2.1 T10.1 U1.5 | length 1613
  Top Layer w10: v4(845,-325) 844.46,-325.54 844.46,-352.46 R67.2 843.93,-440.98 T10.1@855,-452.05
  Bottom Layer w10: C56.2 -129,210.07 -129,146 U1.5 -130,125 -131.1,123.9 -131.1,55.9 -133,54 -133,-45 -124,-54 207.03,-54 221.03,-40 T2.1 623.31,-103.31 774.31,-103.31 784,-113 784,-313 796,-325 v4(845,-325)
  other v4: 855,-460
USB/5.0V: C51.2 P1.1 R52.2 T5.1 U3.4 | length 868.5
  Bottom Layer w20: -584.35,535 -583.85,534.99 R52.2
  Bottom Layer w50: U3.4 -584.35,461.85 -584.35,535 -430.38,688.98 -233,688.98 ; T5.1 -235,686.98 -233,688.98 ; P1.1 -233,688.98
UV_EN: R59.1 U1.18 | length 821.7
  Bottom Layer w10: R59.1@-516.07,-73 147,-73 ; 145,-75 cw(c145,-100) 170,-100 U1.18
VCC/3.0V: C21.2 C22.2 C53.2 D3.1 D10.3 D11.3 D12.3 D13.3 D14.3 D15.3 LS1.1 T4.1 U1.1 U5.2 | length 6428.1
  Top Layer w30: v3(675,-675) 675,-659.61 736,-598.61 v3@736,-165 ; v3@741.5,-159.5 798,-103 938.43,-103 956,-85.43 D11.3@956,-47
  Top Layer w50: -914,-45 -600,-45 cw(c-600,-55) -590,-55 -590,-275 ; v6(-567,-785) -559.82,-785 -524.92,-819.9 ; -483.08,767.1 -466.32,750.34 ; 420,800 416.61,801.25 400.86,817 -185,817 -251.66,750.34 -466.32,750.34 ; v3@455.12,-709.19 v3(448.12,-698) v1(-166,-695.02) -368.82,-694.04 -445.37,-610.67 v6(-527.75,-520.94) -527.75,-519.66 -542.13,-505.28 -590,-453.14 -590,-275 ; 465,-725 490,-765 ; -590,-275 -580,-285 LS1.1 -470,70 v7(-500,100) -500,750.34 -466.32,750.34
  Bottom Layer w30: -537.4,192.6 ccw(c-537.4,220) C53.2 ccw(c-505,220) -505,215 C21.2 -405,150 cw(c-425,150) C22.2 -345,130 ccw(c-345,145) U1.1 ; v3(448.12,-698) 472.12,-674 674,-674 v3(675,-675) ; T4.1 610,-160 v3(742,-160)
  Bottom Layer w50: v6(-567,-785) -568,-784 -568,-765 -667.29,-665.71 -667.29,-624.29 -563.94,-520.94 v6(-527.75,-520.94) ; U5.2 -537.4,192.6 -502.6,192.6 cw(c-502.6,190) -500,190 v7(-500,100) ; v1(-166,-695.02) -155,-684.02 D3.1
VU/4.2V: P3.1 Q9.3 | length 428.7
  Bottom Layer w50: Q9.3 -720,-44.93 -669.23,-44.93 -656.71,-57.45 -656.71,-288.71 -691.96,-323.96 P3.1@-717.46,-323.96
pads on no net: P2.3 P2.4 P3.3 P3.4 U1.2 U1.4 U3.1
copper on no net:
  other v2: -862,360

## Polygon pours and split planes (outlines as drawn)
no net on Top Layer (solid, remove dead copper, pour order 20): 1550,-424

## Other copper
Top Layer:
  pour cut-out: 204,-185 237,-185 238,-186 238,-264 272,-264 275,-264 275,-273 565,-273 565,-302 278,-302 278,-303 278,-313 198,-313 198,-311 198,-264 204,-264
Bottom Layer:
  pour cut-out: 200,-192
  region: -410,498.07

## Silkscreen, mask and mechanical layers (free items; w line width, h text height)
Top Overlay:
  drawing of 3591 lines, arcs and shapes, not listed
Mechanical 1-版形:
  circle w0.5: c78.74,688.98 r41.34
  circle w0.5: c-78.74,688.98 r41.34
  circle w0.5: c0,-767.72 r35.43
  circle w0.5: c334.65,236.24 r19.68
  circle w0.5: c334.65,-334.62 r19.68
  circle w0.5: c-334.65,236.24 r19.68
  circle w0.5: c-334.65,-334.62 r19.68
  lines w0.5: -428.25,-944.88 cw(c0,0) 428.25,-944.88 -428.25,-944.88